# Altium PCB lab4.PcbDoc
Units mil, origin at the board's own origin, x right, y up, seen from the top; angles counter-clockwise.
Board outline 2800 x 3400 mil, 2 copper layers (Top Layer, Top, Bottom Layer, Bottom); 16 components, 10 nets, 44 pads, 0 vias.
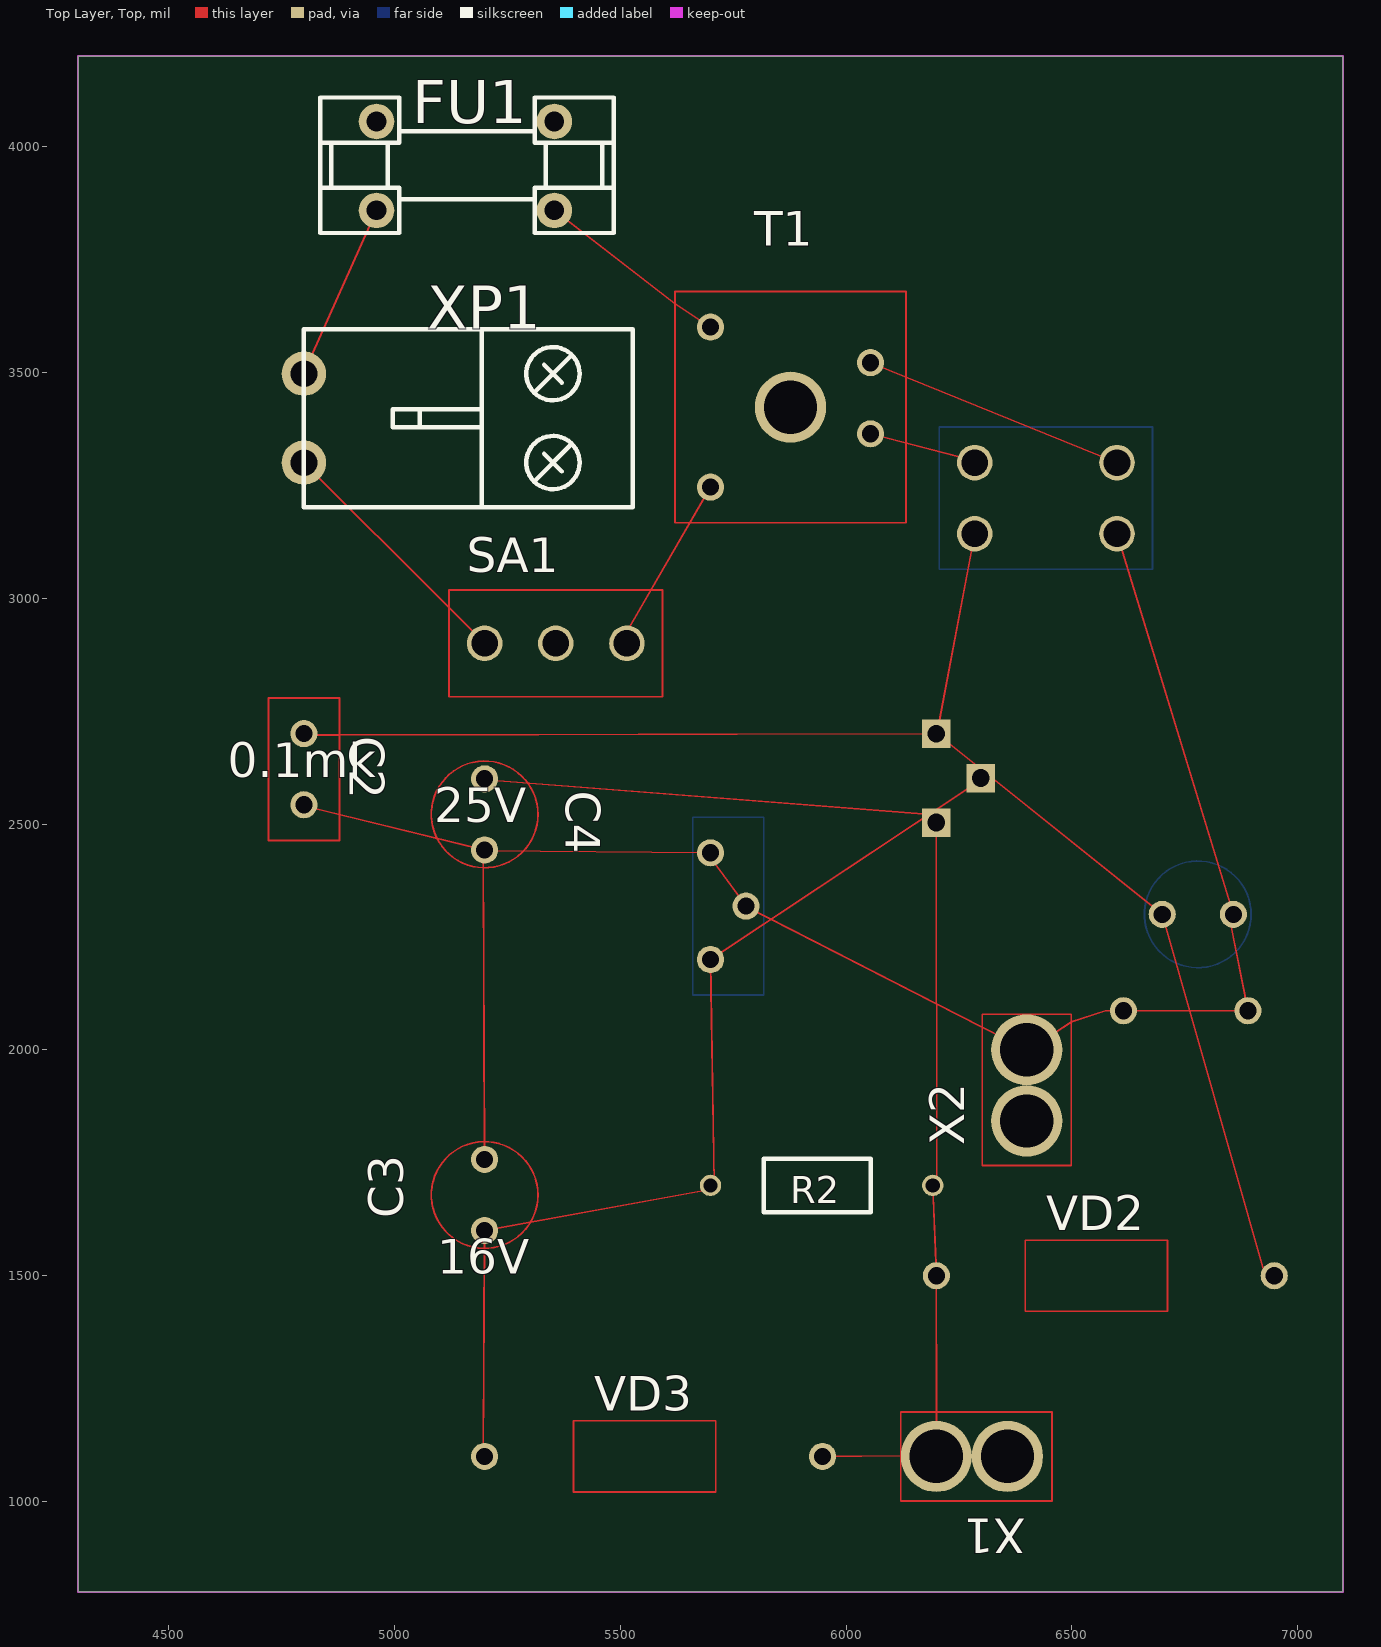
[diagram p0: Top Layer, Top view]
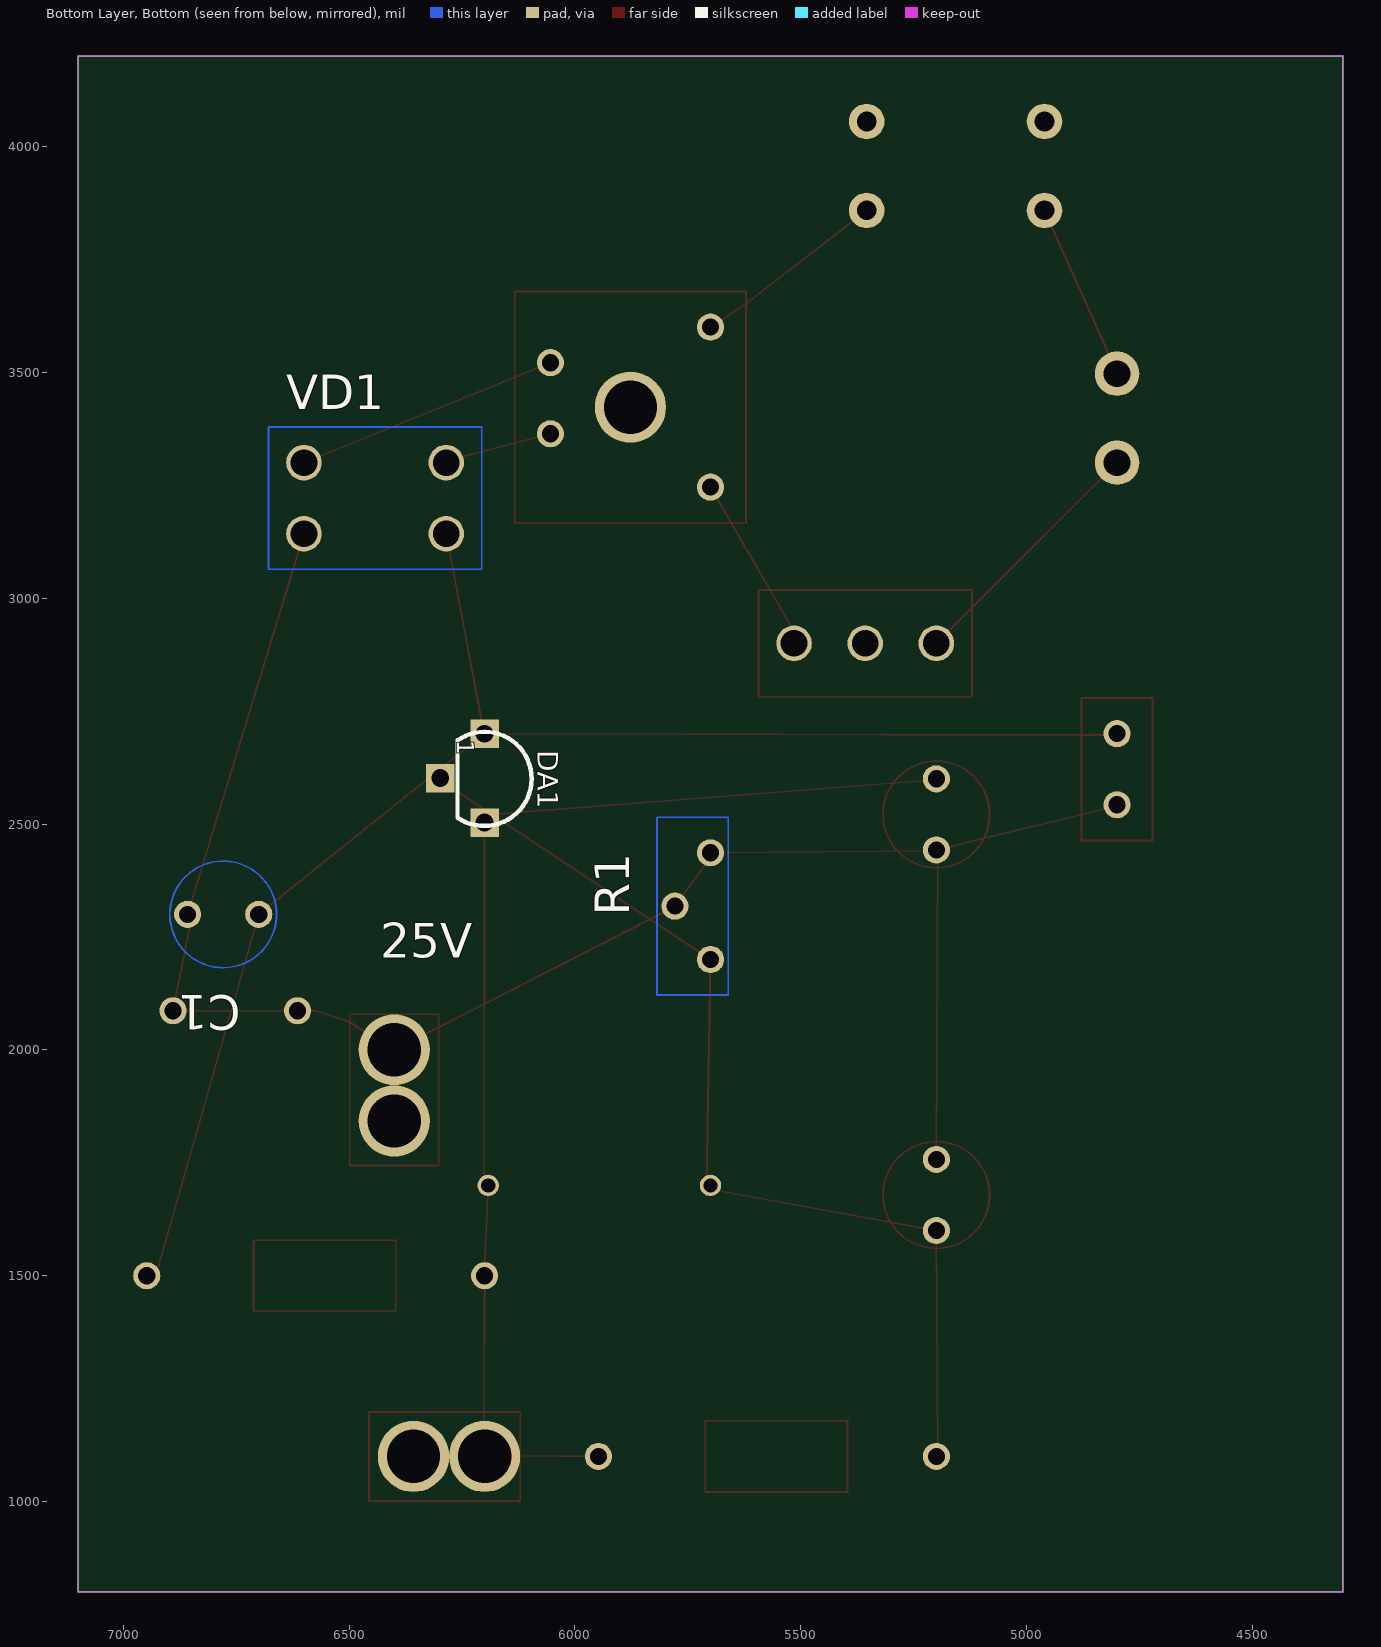
[diagram p1: Bottom Layer, Bottom view, seen from below]

## Layer stack, top to bottom
Top Solder, Top Mask: solder mask 0.4, Solder Resist, Dk 3.5
Top Layer, Top: signal copper 1.4
Dielectric 1: dielectric 12.6, FR-4, Dk 4.8
Bottom Layer, Bottom: signal copper 1.4
Bottom Solder, Bot Mask: solder mask 0.4, Solder Resist, Dk 3.5

## Board outline
4300,4200 4300,800 7100,800 7100,4200 6700,4200

## Design rules (kind name [scope] priority, off if disabled: settings)
Clearance [All] p1: gap=10 ignorepadtopadclearanceinfootprint=FALSE except(0: Arc-Hole Track-Hole SMDPad-Hole THPad-Hole Via-Hole Fill-Hole Poly-Hole Region-Hole Text-Hole; 11.81: Arc-Arc Arc-Track Arc-THPad Arc-Via Track-Track Track-THPad Track-Via THPad-THPad THPad-Via Via-Via)
PlaneClearance [All] p1: clearance=10
PolygonConnect [All] p1: connectstyle=Relief reliefconductorwidth=10 reliefentries=4 polygonreliefangle="90 Angle" airgapwidth=10
RoutingVias [All] p1: holewidth=28 width=50 viastyle="Through Hole" minholewidth=28 minwidth=50 maxholewidth=28 maxwidth=50
SolderMaskExpansion [All] p1: expansion=4
Width [All] p1: maxlimit=10 minlimit=10 preferedwidth=10
29 further rules are at their usual default settings.

## Components (designator, comment, footprint, x,y, rotation, side; value= is the part's Value field where it differs from the comment)
C1 "25V" CAP2 6700,2300 r0 bottom
C2 "0.1mk" CAP1 4800,2700 r270 top
C3 "16V" CAP2 5200,1600 r90 top
C4 "25V" CAP2 5200,2600 r270 top
DA1 "LM317T" KT26-3 6200,2700 r270 bottom
FU1 "0.25A" VP1-1 4960.63,3858.27 r0 top
R1 "4.7k" RESVAR 5700,2200 r90 bottom
R2 "240" МЛТ(0.125) 5700,1700 r0 top
SA1 "" TRN 5200,2900 r0 top
T1 "" TR 5700,3600 r0 top
VD1 "KC407A" DIODEBRIDGE 6600,3300 r180 bottom
VD2 "KD522B" DIODE 6200,1500 r0 top
VD3 "KD522B" DIODE 5200,1100 r0 top
X1 "X1" CONN1X 6200,1100 r180 top
X2 "X1" CONN1X 6400,2000 r90 top
XP1 "" 2XR 4800,3300 r0 top

## Footprints (in the part's own frame and the unit in brackets; to place one, negate y for a bottom-side part, rotate by r counter-clockwise, add the part's x,y. Pads: shape width x height; smd on the part's side, far side on the other; paste and mask are expansions set on the pad)
2XR [mm]
  round 2.5 hole 1.5: 1(0,0) 2(0,5)
  silkscreen extent 0,-2.5 18.5,7.5
CAP1 [mil]
  round 60 hole 38: 1(0,0) 2(157.48,0)
CAP2 [mil]
  round 60 hole 38: 1(0,0) 2(157.48,0)
  Top Layer, Top circle w3.94: c78.74,0 r118.11
CONN1X [mm]
  round 4 hole 3: 1(0,0) 2(-4,0)
DIODE [mil]
  round 60 hole 38: 1(0,0) 2(748.03,0)
  Top Layer, Top lines w3.94: 196.85,-78.74 511.81,-78.74 511.81,78.74 196.85,78.74 196.85,-78.74
DIODEBRIDGE [mm]
  round 2 hole 1.5: 1(0,0) 2(8,0) 3(0,-4) 4(8,-4)
  Top Layer, Top lines w0.1: 10,-6 -2,-6 -2,2 10,2 10,-6
KT26-3 [mm]
  rect 1.6x1.6 hole 1: 1(0,0) 2(2.5,-2.5) 3(5,0)
  silkscreen extent -0.11,-1.52 5.18,2.67
RESVAR [mil]
  round 60 hole 38: 1(0,0) 2(236.22,0) 3(118.11,78.74)
  Top Layer, Top lines w3.94: -78.74,-39.37 314.96,-39.37 314.96,118.11 -78.74,118.11 -78.74,-39.37
TR [mil]
  round 60 hole 38: 1(0,0) 2(0,-354.33) 3(354.33,-78.74) 4(354.33,-236.22)
  round 157.48 hole 118.11 unplated: 5(177.17,-177.17)
TRN [mm]
  round 2 hole 1.5: 1(0,0) 2(8,0) 3(4,0)
VP1-1 [mm]
  round 2 hole 1.1: 1(0,0) 2(10,0) 3(10,5) 4(0,5)
  silkscreen extent -3.17,-1.27 13.33,6.35
МЛТ(0.125) [mm]
  round 1.2 hole 0.8: 1(0,0) 2(12.5,0)
  silkscreen extent 3,-1.5 9,1.5

## Free pads (board coordinates)
  round 60 hole 38: 0(6614.17,2086.61) 0(6889.76,2086.61)

## Nets (pads, with @x,y where several pads share a name; then routed paths per layer and width w, separated by ;. In a path a pad name is that pad's centre, name@x,y a point inside that pad or via, vN(x,y) a via of type N, cw(c..) or ccw(c..) an arc to the next point about the centre after c; other vN are vias at no path point)
NET00000: FU1.1 XP1.2 | length 395.8
  Top Layer, Top w3.94: XP1.2 4800,3500 FU1.1
NET00001: SA1.1 XP1.1 | length 1983
  Top Layer, Top w3.94: XP1.1 5121.26,2978.74 ; SA1.1 5121.26,2978.74 ; 5121.26,2978.74 5121.26,3018.11 5593.7,3018.11 5593.7,2781.89 5121.26,2781.89 5121.26,2978.74
NET00002: SA1.2 T1.2 | length 414.3
  Top Layer, Top w3.94: SA1.2 5500,2900 5503.75,2906.49 T1.2
NET00003: FU1.2 T1.1 | length 2479
  Top Layer, Top w3.94: FU1.2 5621.26,3651.41 ; T1.1 5621.26,3651.41 ; 5621.26,3651.41 5621.26,3166.93 6133.07,3166.93 6133.07,3678.74 5621.26,3678.74 5621.26,3651.41
NET00004: T1.3 VD1.1 | length 588.8
  Top Layer, Top w3.94: T1.3 VD1.1
NET00005: T1.4 VD1.2 | length 268.8
  Top Layer, Top w3.94: T1.4 6285.98,3303.64 6300,3300 VD1.2
NET00006: C1.1 C2.1 DA1.1 VD1.4 VD2.2 | length 4380.8
  Top Layer, Top w3.94: C2.1 4783.46,2696.85 4800.01,2696.89 4878.74,2697.06 ; VD1.4 DA1.1@6201.42,2700.22 ; VD2.2 6929.13,1496.06 C1.1 DA1.1@6201.42,2700.22 ; 4878.74,2697.06 DA1.1 ; 4878.74,2697.06 4878.74,2778.74 4721.26,2778.74 4721.26,2463.78 4878.74,2463.78 4878.74,2697.06 ; DA1.1 6181.1,2716.54 6200.67,2700.83 DA1.1@6201.42,2700.22 ; DA1.1 6200.79,2696.85 6201.34,2699.75 DA1.1@6201.42,2700.22
NET00008: C4.1 DA1.3 R2.2 VD2.1 VD3.2 X1.1 | length 3772.5
  Top Layer, Top w3.94: C4.1 5196.85,2598.43 5199.86,2598.19 6200.79,2519.68 DA1.3 6200.78,1700.01 6200.79,1692.91 R2.2 6200.62,1500.03 6200.79,1496.06 VD2.1 6200.6,1198.43 ; VD3.2 6121.26,1101.62 ; X1.1 X1.1@6200.79,1102.36 ; 6121.26,1101.62 6199.98,1102.35 X1.1@6200.79,1102.36 ; 6121.26,1101.62 6121.26,1001.57 6455.91,1001.57 6455.91,1198.43 6200.6,1198.43 ; 6121.26,1101.62 6121.26,1198.43 6200.6,1198.43 ; 6200.6,1198.43 X1.1@6200.79,1102.36
NET00010: C1.2 C2.2 C3.2 C4.2 pad.0 R1.2 R1.3 VD1.3 X2.1 | length 5163.6
  Top Layer, Top w3.94: C2.2 4803.15,2539.37 C4.2 C4.2@5196.85,2440.94 ; C3.2 C4.2@5196.85,2440.94 ; VD1.3 6850.39,2322.83 C1.2 6850.39,2283.46 6889.76,2086.61 6614.17,2086.61 6574.8,2086.61 6498.43,2061.7 ; C4.2@5196.85,2440.94 5199.98,2440.92 R1.2@5692.38,2436.29 ; R1.2@5692.38,2436.29 5695.06,2432.61 R1.3 5767.72,2322.83 5778.37,2317.39 6301.57,2050.25 ; R1.2@5692.38,2436.29 R1.2 5688.98,2440.94 R1.2@5692.38,2436.29 ; 6301.57,2050.25 6301.57,1744.09 6498.43,1744.09 6498.43,2061.7 ; 6301.57,2050.25 X2.1 6417.32,2007.87 6498.43,2061.7 ; 6301.57,2050.25 6301.57,2078.74 6498.43,2078.74 6498.43,2061.7
NET00011: C3.1 DA1.2 R1.1 R2.1 VD3.1 | length 2259.8
  Top Layer, Top w3.94: VD3.1 5196.85,1102.36 C3.1 5701.53,1691.61 R2.1@5708.66,1692.91 ; R2.1 R2.1@5708.66,1692.91 ; DA1.2 6299.21,2598.43 R1.1 5708.54,1700.15 R2.1@5708.66,1692.91
pads on no net: FU1.3 FU1.4 SA1.3 T1.5 X1.2 X2.2

## Keep-outs
Keep-Out Layer, Board:
  the board outline again, w5

## Text inside footprints (layer, text, board x,y; h text height)
DA1: Bottom Overlay, Bot Silk "1" at 6260.5,2685.5 h37.5 r90